# EAGLE board BLDC driver board 4 layer (EAGLE 6.1)
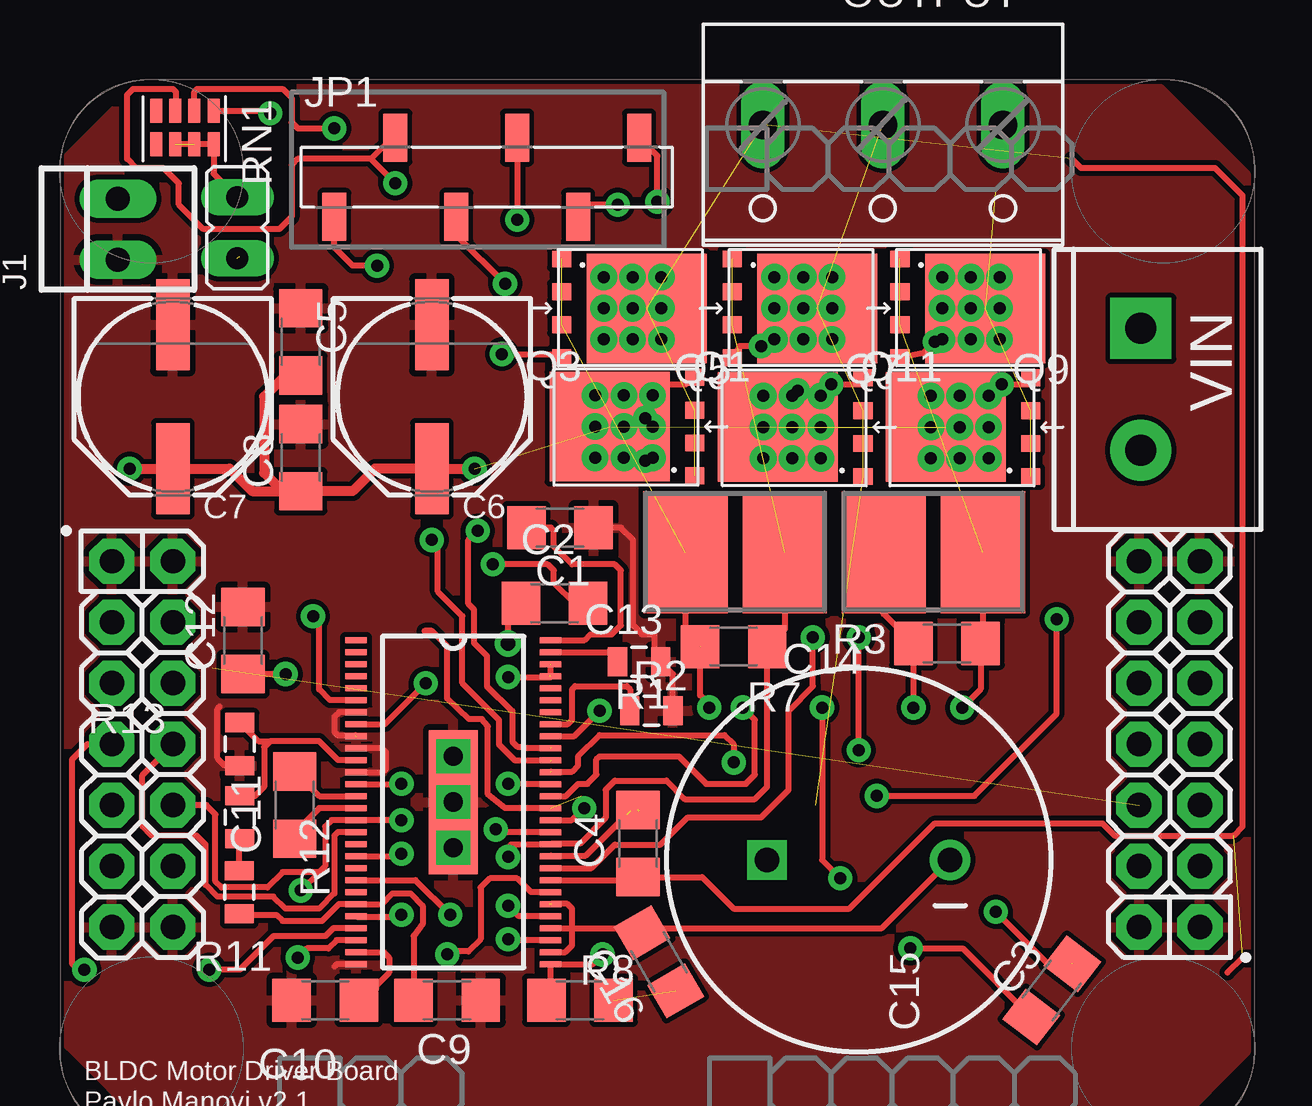
[diagram p0: board, top side]
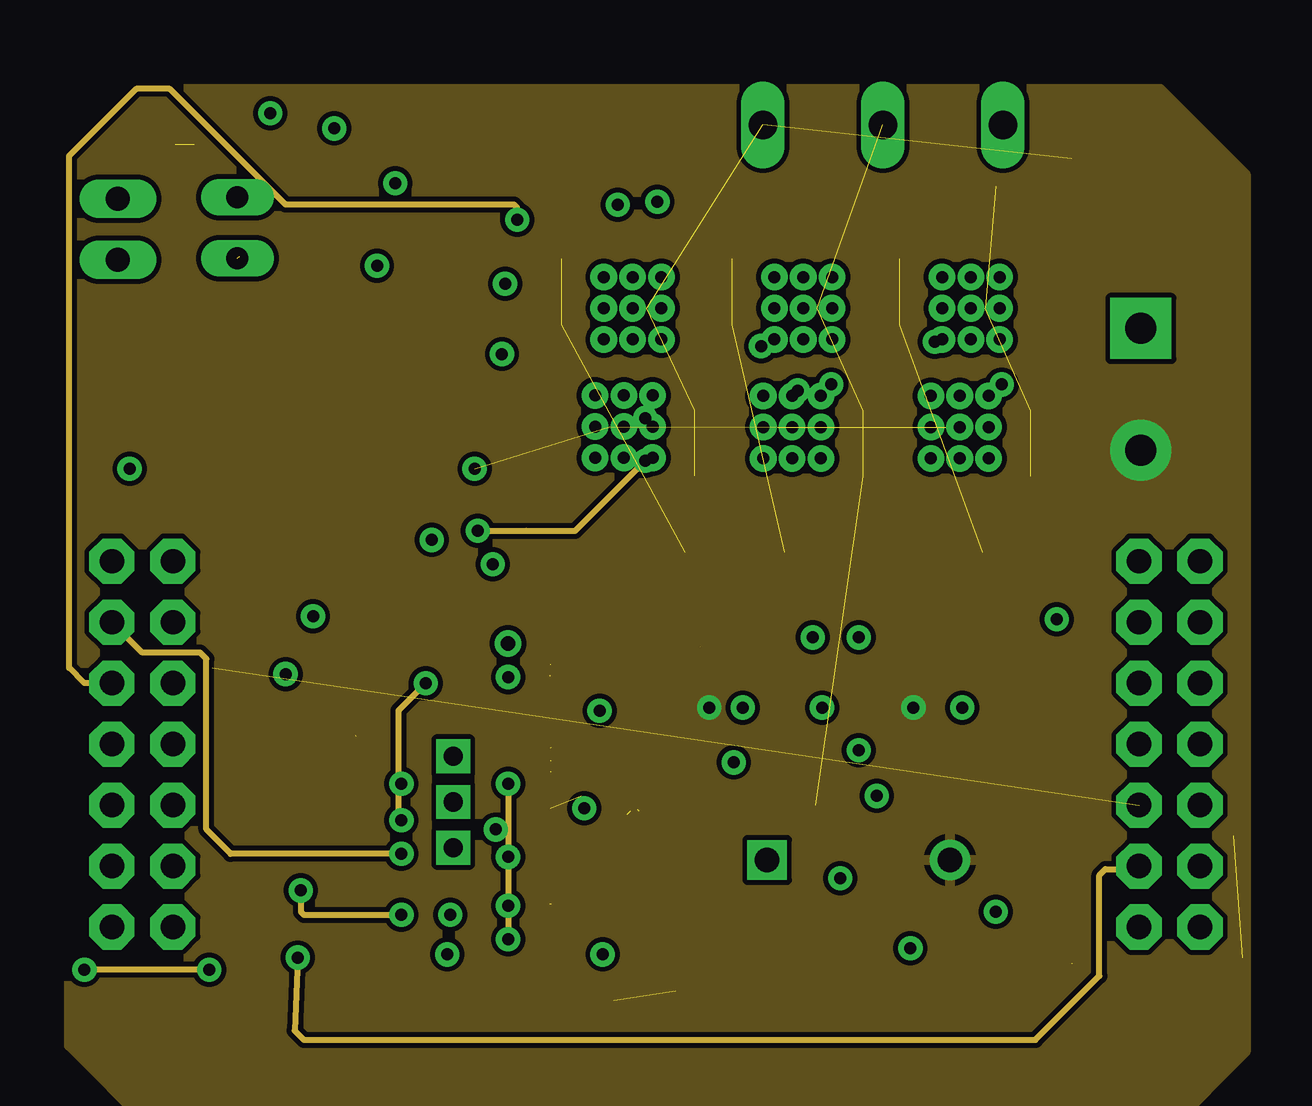
[diagram p1: board, inner layer Route2]
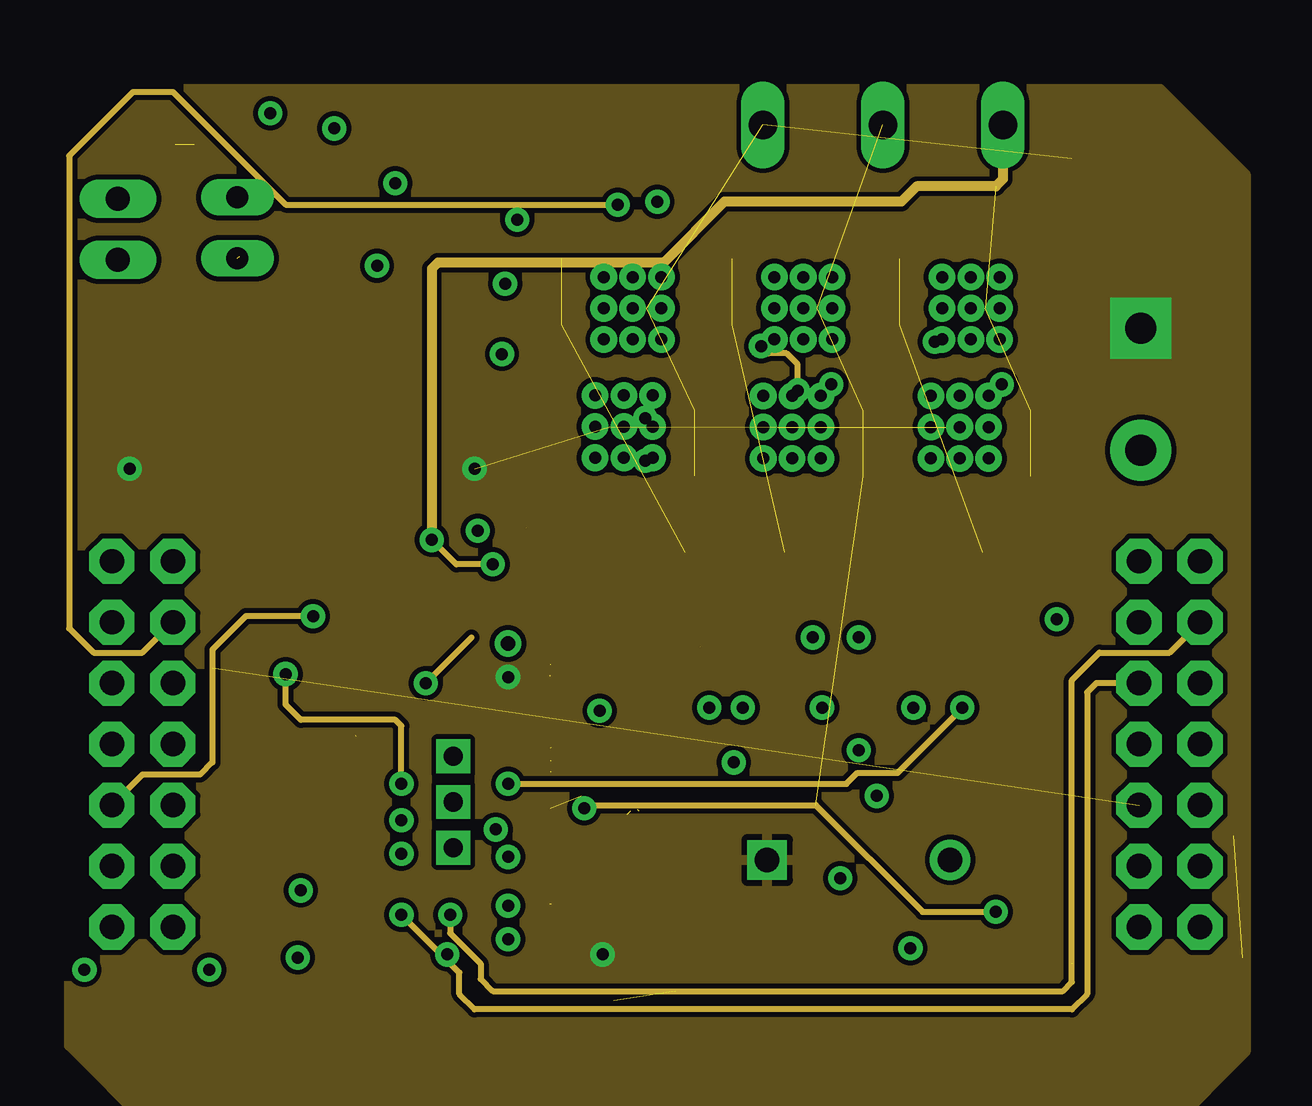
[diagram p2: board, inner layer Route15]
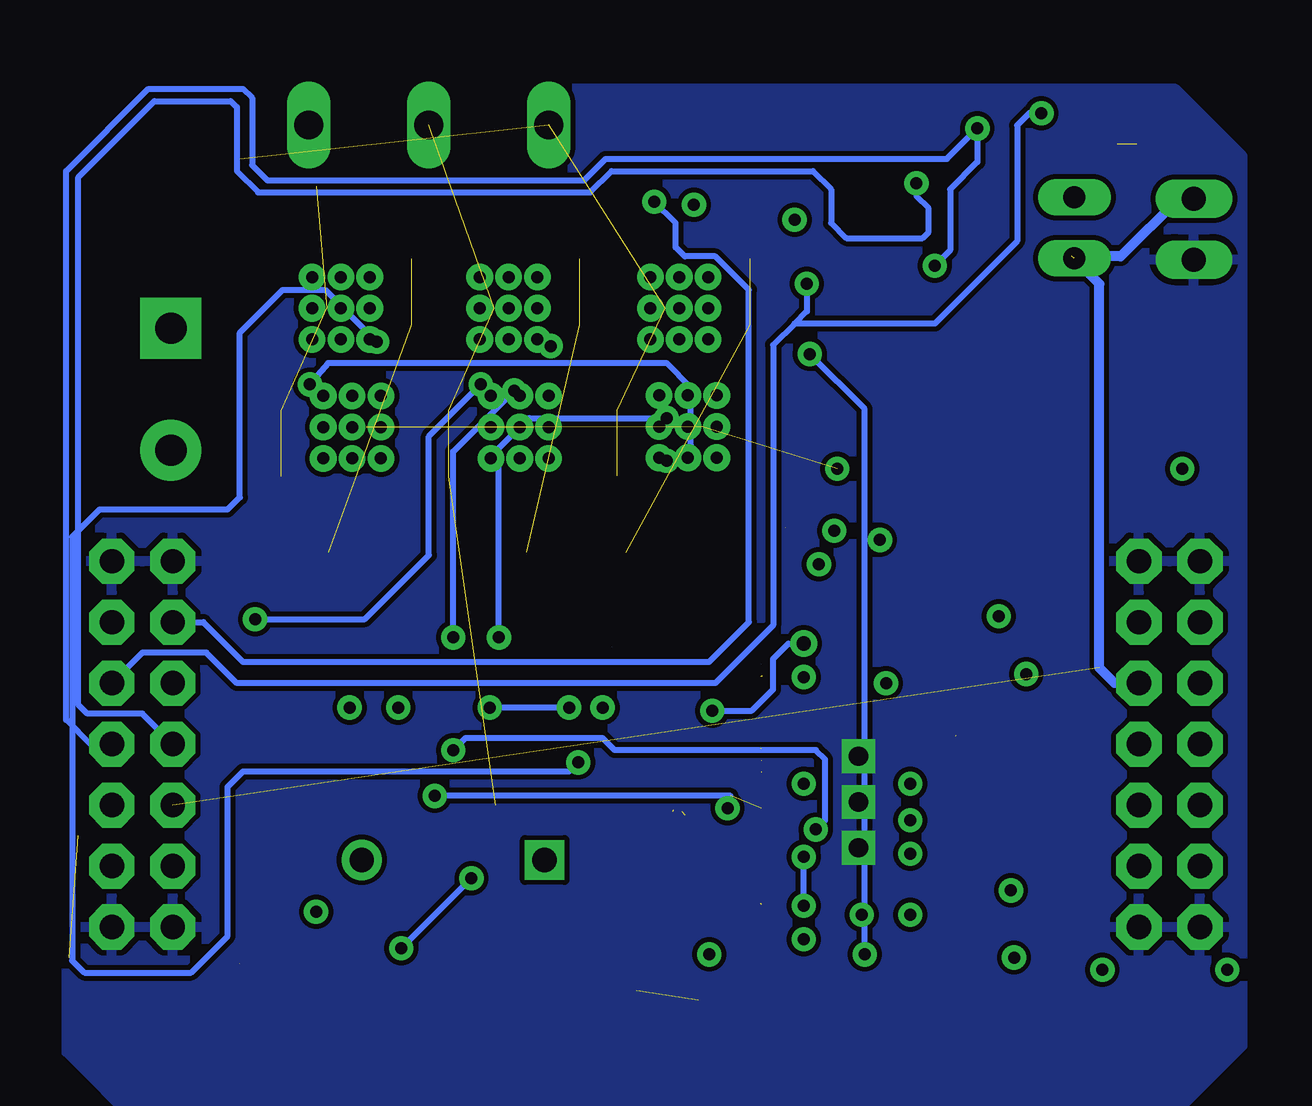
[diagram p3: board, bottom side, seen from below]

No outline drawn. Coordinates in mm, seen from the top.
Copper layers (1*2+15*16): Top 0.035mm / dielectric 1.5mm / Route2 0.035mm / dielectric 0.15mm / Route15 0.035mm / dielectric 0.2mm / Bottom 0.035mm
Design rules: minimum track width 8mil, minimum drill 20mil, track to track 8mil, track to pad 8mil, pad to pad 8mil, via to via 8mil, smd to smd 8mil, copper to edge 10mil, drill to drill 8mil, minimum pad ring 12mil, minimum via ring 10mil, stop-mask expansion 4mil, vias tented up to drill 25mil, thermal gap 10mil

## Footprints (pad centres in the part's own frame; a part is rotated, then mirrored left to right if it is on the bottom)
1206 = smd 1.6 x 1.8: 1 -1.4,0; 2 1.4,0
PANASONIC_E = smd 3.8 x 1.4: + 3,0; - -3,0
CPOL-RADIAL-1000UF-63V = drill 1.016 pad 1.651 square: 1 3.81,0 | drill 1.016 pad 1.676: 2 -3.81,0
HTSSOP56 = smd 0.9 x 0.25: 1 -4.05,6.75; 2 -4.05,6.25; 3 -4.05,5.75; 4 -4.05,5.25; 5 -4.05,4.75; 6 -4.05,4.25; 7 -4.05,3.75; 8 -4.05,3.25; 9 -4.05,2.75; 10 -4.05,2.25; 11 -4.05,1.75; 12 -4.05,1.25; 13 -4.05,0.75; 14 -4.05,0.25; 15 -4.05,-0.25; 16 -4.05,-0.75; 17 -4.05,-1.25; 18 -4.05,-1.75; 19 -4.05,-2.25; 20 -4.05,-2.75; 21 -4.05,-3.25; 22 -4.05,-3.75; 23 -4.05,-4.25; 24 -4.05,-4.75; 25 -4.05,-5.25; 26 -4.05,-5.75; 27 -4.05,-6.25; 28 -4.05,-6.75; 29 4.05,-6.75; 30 4.05,-6.25; 31 4.05,-5.75; 32 4.05,-5.25; 33 4.05,-4.75; 34 4.05,-4.25; 35 4.05,-3.75; 36 4.05,-3.25; 37 4.05,-2.75; 38 4.05,-2.25; 39 4.05,-1.75; 40 4.05,-1.25; 41 4.05,-0.75; 42 4.05,-0.25; 43 4.05,0.25; 44 4.05,0.75; 45 4.05,1.25; 46 4.05,1.75; 47 4.05,2.25; 48 4.05,2.75; 49 4.05,3.25; 50 4.05,3.75; 51 4.05,4.25; 52 4.05,4.75; 53 4.05,5.25; 54 4.05,5.75; 55 4.05,6.25; 56 4.05,6.75 | smd 2.032 x 6: 57 0,0 | drill 0.8 square: P$1 0,0; P$2 0,1.905; P$3 0,-1.905
SOCKET-MALE-2.54MM-2 = drill 1 long: 1 -1.27,0; 2 1.27,0
1X06_SMD_STRAIGHT = smd 1 x 2: 1 0,1.65; 2 -2.54,-1.65; 3 -5.08,1.65; 4 -7.62,-1.65; 5 -10.16,1.65; 6 -12.7,-1.65
JP1 = drill 0.914 long: 1 0,-1.27; 2 0,1.27
W237-103 = drill 1.194 long: 1 -5,-1.29; 2 0,-1.29; 3 5,-1.29
CSD173XXQX = smd 5 x 4.565: D 1.21,0 | smd 0.8 x 0.7: G 4.755,2.055; S1 4.755,0.685; S2 4.755,-0.685; S3 4.755,-2.055 | drill 0.5: P$1 3,1.3; P$2 3,0; P$3 3,-1.3; P$4 0.6,0; P$5 0.6,1.3; P$6 0.6,-1.3; P$7 1.8,1.3; P$8 1.8,0; P$9 1.8,-1.3
0805 = smd 0.8 x 1.2: 1 -0.9,0; 2 0.9,0
SMT-REF = smd 3.505 x 5.08: 1 2.134,0; 2 -2.007,0
EXB-38V271JV = smd 0.5 x 1: P$1 0,0; P$2 0.8,0; P$3 1.6,0; P$4 2.4,0; P$5 2.4,1.4; P$6 1.6,1.4; P$7 0.8,1.4; P$8 0,1.4
CAN_NODE_SHIELD_V3 = drill 1.016 pad 1.88 octagon: 3V3 44.704,19.05; 3V31 4.445,13.97; 5V 44.704,13.97; 5V1 4.445,19.05; A0 44.704,11.43; CAN_HIGH 1.905,11.43; CAN_LOW 4.445,11.43; GND 44.704,24.13; GND1 47.244,24.13; GND2 44.704,8.89; GND3 47.244,8.89; GND4 4.445,8.89; GND5 1.905,8.89; GND6 4.445,24.13; GND7 1.905,24.13; MCLR 47.244,13.97; PGC 1.905,13.97; PGD 47.244,11.43; RA2 1.905,16.51; RB0 47.244,16.51; RB1 44.704,16.51; RB2 47.244,19.05; RB8 4.445,16.51; RB9 4.445,21.59; RB10 1.905,19.05; RB12 1.905,21.59; RB14 47.244,21.59; RB15 44.704,21.59
SCREW_TERMINAL-5.08MM-2 = drill 1.3 pad 2.54 square: 1 -2.54,0 | drill 1.3 pad 2.54: 2 2.54,0

## Placement (x,y rotation side)
C1  .015uF  [1206]  23.11,25.53 180 top
C2  .1uF  [1206]  22.89,22.38 0 top
C3  .1uF  [1206]  43.61,6.25 52.5 top
C4  .1uF  [1206]  26.37,12.37 270 top
C5  .1uF  [1206]  12.32,33.27 90 top
C6  47uF  [PANASONIC_E]  17.78,30.99 270 top
C7  4.7uF  [PANASONIC_E]  6.99,30.99 270 top
C8  .1uF  [1206]  12.32,28.45 90 top
C9  1uF  [1206]  18.41,5.84 0 top
C10  1uF  [1206]  13.34,5.84 180 top
C11  22nF  [1206]  12.06,13.97 270 top
C12  2.2uF  [1206]  9.91,20.83 90 top
C13  1nF  [1206]  30.35,20.57 180 top
C14  1nF  [1206]  39.24,20.7 180 top
C15  470  [CPOL-RADIAL-1000UF-63V]  35.56,11.68 180 top
C16  10nF  [1206]  27.24,7.44 120 top
DRV8301  DRV8302  [HTSSOP56]  18.67,14.1 0 top
J1  [SOCKET-MALE-2.54MM-2]  4.7,37.97 90 top
JP1  [1X06_SMD_STRAIGHT]  26.42,40.13 0 top
JP3  [JP1]  9.68,38.02 180 top
OUTPUT  [W237-103]  36.58,41.02 180 top
Q1  CSD173XXQX-NEXFET  [CSD173XXQX]  30.99,29.72 0 top
Q3  CSD173XXQX-NEXFET  [CSD173XXQX]  23.98,29.74 0 top
Q5  CSD173XXQX-NEXFET  [CSD173XXQX]  27.94,34.67 180 top
Q7  CSD173XXQX-NEXFET  [CSD173XXQX]  35.05,34.67 180 top
Q9  CSD173XXQX-NEXFET  [CSD173XXQX]  42.04,34.67 180 top
Q11  CSD173XXQX-NEXFET  [CSD173XXQX]  37.97,29.72 0 top
R1  10k  [0805]  26.42,19.94 0 top
R2  1M  [0805]  26.92,17.91 0 top
R3  .01  [SMT-REF]  38.73,24.51 180 top
R7  .01  [SMT-REF]  30.48,24.51 180 top
R8  3.3  [1206]  23.95,5.84 180 top
R11  10k  [0805]  9.75,10.34 270 top
R12  3.16k  [0805]  9.78,13.46 270 top
R13  470  [0805]  9.78,16.51 90 top
RN1  [EXB-38V271JV]  8.69,42.9 180 top
U$2  CAN_NODE_SHIELD_V3  [CAN_NODE_SHIELD_V3]  2.54,0 0 top
VIN  [SCREW_TERMINAL-5.08MM-2]  47.32,31.29 270 top

## Library data of the parts
C1-C16 J1 JP1 R1 R2 R11-R13 U$2 = ASL
DRV8301 Q1 Q3 Q5 Q7 Q9 Q11 R3 R7 = pavlo
JP3 = jumper
OUTPUT = con-wago-500; MPN: 237-103; OC_FARNELL: unknown; OC_NEWARK: 18M7116
R8 VIN = CMPE118lib
RN1 = ASL; OC_FARNELL: unknown; OC_NEWARK: unknown

## Nets
3V3: DRV8301.8 DRV8301.16 DRV8301.24 U$2.3V3 U$2.3V31
ADC/HALL1: JP1.6 RN1.P$2 U$2.RB0
ADC/HALL2: JP1.5 RN1.P$3 U$2.RB1
ADC/HALL3: JP1.4 RN1.P$1 U$2.RB2
CRRNTSNS1: DRV8301.25 U$2.RA2
CRRNTSNS2: DRV8301.26 U$2.A0
GH_A: DRV8301.47 Q11.G
GH_B: DRV8301.42 Q1.G
GH_C: DRV8301.37 Q3.G
GL_A: DRV8301.45 Q9.G
GL_B: DRV8301.40 Q7.G
GL_C: DRV8301.35 Q5.G
GND: C1.1 C5.2 C6.- C7.- C8.2 C9.2 C10.2 C12.2 DRV8301.7 DRV8301.9 DRV8301.10 DRV8301.12 DRV8301.28 DRV8301.57 DRV8301.P$1 DRV8301.P$2 DRV8301.P$3 J1.1 R1.2 R2.2 R13.1 U$2.GND U$2.GND1 U$2.GND2 U$2.GND3 U$2.GND4 U$2.GND5 U$2.GND6 U$2.GND7
N$1: C1.2 DRV8301.56
N$2: DRV8301.6 U$2.PGC
N$3: DRV8301.49 R2.1
N$4: C2.1 DRV8301.48
N$6: C3.1 DRV8301.43
N$7: C16.1 R8.1
N$8: C4.1 DRV8301.38
N$9: R11.1 R12.2
N$10: DRV8301.55 R1.1
N$12: DRV8301.11 R12.1 R13.2
N$13: JP3.1 RN1.P$6 RN1.P$7 RN1.P$8
N$16: C10.1 DRV8301.27
N$18: C9.1 DRV8301.23 R11.2
N$19: C11.1 DRV8301.14
N$20: C11.2 DRV8301.15
N$21: C12.1 DRV8301.13
OUTPUTA: C2.2 DRV8301.46 OUTPUT.1 Q9.D Q11.S1 Q11.S2 Q11.S3
OUTPUTB: C3.2 DRV8301.41 OUTPUT.2 Q1.S1 Q1.S2 Q1.S3 Q7.D
OUTPUTC: C4.2 DRV8301.36 OUTPUT.3 Q3.S1 Q3.S2 Q3.S3 Q5.D
PWM1: DRV8301.17 U$2.RB8
PWM2: DRV8301.19 U$2.RB12
PWM3: DRV8301.21 U$2.RB14
QEI-A: JP1.3 U$2.RB10
QEI-B: JP1.2 U$2.RB9
QEI-INDEX: JP1.1 U$2.RB15
SN1: C13.1 DRV8301.33 DRV8301.39 Q7.S1 Q7.S2 Q7.S3 R7.2
SN2: C14.1 DRV8301.31 DRV8301.44 Q9.S1 Q9.S2 Q9.S3 R3.2
V_BATT: C5.1 C6.+ C7.+ C8.1 C15.1 DRV8301.29 DRV8301.53 DRV8301.54 Q1.D Q3.D Q11.D R8.2 VIN.1
VCC: J1.2 JP3.2 U$2.5V U$2.5V1
VNEG: C13.2 C14.2 C15.2 C16.2 DRV8301.30 DRV8301.32 DRV8301.34 Q5.S1 Q5.S2 Q5.S3 R3.1 R7.1 VIN.2

## Tracks (layer width: path | path; a pad name or v marks a point on that pad's centre or on a via)
3V3  (via drill 0.5)
  Top 0.254: 13.08,11.18 13.34,11.43 13.34,13.08 13.6,13.35 DRV8301.16 14.63,13.34 v16.51,13.34 | 13.08,11.18 11.56,11.18 10.92,10.54 9.02,10.54 8.76,10.79 8.76,13.59 8.38,13.97 U$2.3V31 | 13.08,11.18 v12.32,10.41 | DRV8301.24 14.64,9.32 16.43,9.32 v16.51,9.4 | DRV8301.8 15.82,17.35 v17.53,19.05
  Route2 0.254: v12.32,10.41 12.32,9.53 12.45,9.4 v16.51,9.4 | v17.53,19.05 16.38,17.91 16.38,13.46 v16.51,13.34
  Route15 0.254: v17.53,19.05 19.43,20.95 | U$2.3V3 45.47,19.05 45.09,18.67 45.09,6.1 44.45,5.46 19.56,5.46 18.92,6.1 18.92,6.99 v16.51,9.4
ADC/HALL1  (via drill 0.5)
  Top 0.254: RN1.P$2 7.89,43.7 8,43.81 11.56,43.81 11.94,43.43 11.94,42.42 12.19,42.16 v13.72,42.16 | v15.49,36.45 14.48,36.45 13.72,37.21 JP1.6
  Bottom 0.254: U$2.RB0 50.67,16.51 51.69,17.53 51.69,40.39 48.26,43.81 44.32,43.81 43.94,43.43 43.94,40.64 43.31,40.01 30.1,40.01 29.21,40.89 14.99,40.89 v13.72,42.16 13.72,40.77 14.86,39.62 14.86,37.08 v15.49,36.45
ADC/HALL2  (via drill 0.5)
  Top 0.254: JP1.5 16.13,41.78 15.24,40.89 | 15.24,40.89 12.19,40.89 11.94,40.64 11.94,38.48 11.43,37.97 8.26,37.97 7.24,38.99 7.24,39.88 6.6,40.51 5.46,40.51 5.08,40.89 5.08,43.56 5.33,43.81 6.99,43.81 7.11,43.69 7.11,42.93 RN1.P$3 | 15.24,40.89 v16.26,39.88
  Bottom 0.254: U$2.RB1 48.51,17.78 50.8,17.78 51.18,18.16 51.18,40.13 48.01,43.31 44.83,43.31 44.58,43.05 44.58,40.39 43.69,39.5 29.84,39.5 28.96,40.39 20.57,40.39 19.81,39.62 19.81,38.23 19.18,37.59 16,37.59 15.75,37.85 15.75,38.84 16.26,39.34 v16.26,39.88
ADC/HALL3  (via drill 0.5)
  Top 0.254: RN1.P$1 10.95,42.9 v11.05,42.8 | JP1.4 18.8,37.72 v20.83,35.69
  Bottom 0.254: 21.34,34.04 15.49,34.04 12.06,37.47 12.06,42.29 11.56,42.8 v11.05,42.8 | 21.34,34.04 22.23,33.15 22.23,21.46 24.64,19.05 44.58,19.05 45.85,20.32 48.51,20.32 U$2.RB2 | v20.83,35.69 20.83,34.54 21.34,34.04
CRRNTSNS1  (via drill 0.5)
  Top 0.254: DRV8301.25 13.67,8.85 13.34,8.51 11.18,8.51 9.78,7.11 v8.51,7.11 | v3.3,7.11 3.05,7.11 2.79,7.37 2.79,15.88 3.43,16.51 U$2.RA2
  Route2 0.254: v8.51,7.11 v3.3,7.11
CRRNTSNS2  (via drill 0.5)
  Top 0.254: DRV8301.26 13.81,8.35 13.46,8 12.57,8 v12.19,7.62
  Route2 0.254: v12.19,7.62 12.06,4.57 12.45,4.19 42.93,4.19 45.59,6.86 45.59,11.05 45.85,11.3 47.12,11.3 U$2.A0
GH_A  (via drill 0.5)  (1 unrouted)
  Top 0.254: v19.68,25.4 19.3,25.02 19.3,22.35 19.53,22.12 19.53,20.73 20.07,20.19 20.07,18.92 21.13,17.88 21.13,16.61 21.34,16.41 21.57,16.41 21.61,16.36 22.76,16.36 | v41.53,31.5 42.63,31.5 Q11.G
  Route2 0.254: v19.68,25.4 23.75,25.4 v26.67,28.32
  Bottom 0.254: v26.67,28.32 26.29,28.32 25.65,28.96 25.65,31.37 26.67,32.38 40.77,32.38 v41.53,31.5
GH_B  (via drill 0.5)  (1 unrouted)
  Top 0.254: v36.32,14.35 40.39,14.35 43.81,17.78 v43.81,21.72 | DRV8301.42 20.83,13.84 20.12,14.43 20.12,17.25 19.86,17.55 19.33,17.55 18.41,18.41 18.41,20.6 17.78,21.23 17.48,21.23 | v34.42,31.5 35.65,31.5 Q1.G
  Bottom 0.254: 24,14.35 v36.32,14.35 | v43.81,21.72 39.24,21.72 36.58,24.38 36.58,29.34 v34.42,31.5
GH_C  (via drill 0.5)
  Top 0.254: v33.66,20.95 33.66,18.92 32.64,17.91 32.64,14.61 31.5,13.46 28.45,13.46 27.3,12.32 25.4,12.32 24.43,11.35 DRV8301.37 | v26.67,30.1 26.67,31.11 27.05,31.5 28.35,31.5 Q3.G
  Bottom 0.254: v33.66,20.95 33.66,28.83 32.38,30.1 v26.67,30.1
GL_A  (via drill 0.5)  (1 unrouted)
  Top 0.254: 22.74,15.37 DRV8301.45 | 22.73,15.37 23.62,15.37 23.88,15.62 23.88,16 24.77,16.89 29.97,16.89 30.35,16.51 v30.35,15.75 | v38.73,33.27 38.24,32.79 Q9.G
  Bottom 0.254: v30.35,15.75 30.73,15.37 44.32,15.37 44.96,14.73 44.96,8.51 46.48,6.99 50.93,6.99 51.44,7.49 51.44,25.15 50.29,26.29 44.96,26.29 44.45,26.8 44.45,33.66 42.67,35.43 40.89,35.43 v38.73,33.27
GL_B  (via drill 0.5)
  Top 0.254: v35.56,16.26 v35.56,20.95 | DRV8301.40 20.55,12.85 v20.45,12.95 | v31.5,33.1 30.6,33.1 Q7.G
  Route15 0.254: v33.02,31.24 33.02,32.33 32.56,32.79 31.8,32.79 v31.5,33.1
  Bottom 0.254: v35.56,20.95 35.56,28.7 v33.02,31.24 | v20.45,12.95 20.07,13.34 20.07,15.88 20.45,16.26 28.83,16.26 29.34,16.76 35.05,16.76 v35.56,16.26
GL_C  (via drill 0.5)
  Top 0.254: v18.41,7.75 18.54,7.87 19.3,7.87 19.81,8.38 19.81,10.54 20.19,10.92 21.34,10.92 21.91,10.35 DRV8301.35 | v20.7,32.77 22.9,32.77 Q5.G
  Bottom 0.254: v18.41,7.75 18.41,30.48 v20.7,32.77
GND  (1 unrouted)
  Top 0.254: DRV8301.12 15.73,15.35 15.88,15.49 15.88,16.15 15.7,16.33 14.63,16.33 DRV8301.10 | R13.1 9.15,15.61 8.84,15.93 8.84,17.98 8.94,18.09 | DRV8301.7 13.91,17.85 13.72,17.65 13.72,17.02 13.84,16.89 14.61,16.89 | DRV8301.28 13.82,7.35 13.72,7.24 | 24.64,25.53 25.65,25.53 26.16,25.02 26.16,21.46 26.54,21.08 27.05,21.08 27.05,20.2 R1.2 27.82,19.43 R2.2
  pour Top: 5.46,43.81 48.13,43.81 51.69,40.26 51.69,3.68 48.51,0.51 6.1,0.51 2.67,3.94 2.67,41.02
  pour Bottom: 5.46,43.81 48.13,43.81 51.69,40.26 51.69,3.68 48.51,0.51 6.1,0.51 2.67,3.94 2.67,41.02
N$1  (1 unrouted)
  Top 0.254: 21.72,24.77 C1.2 | C1.2 22.73,25.53 22.86,25.4 22.86,24.77 23.62,24 25.4,24 25.65,23.75 25.65,21.46 25.27,21.08 24.38,21.08 24.15,20.85 DRV8301.56
N$2  (via drill 0.5)
  Top 0.254: DRV8301.6 13.53,18.35 13.08,18.8 13.08,21.59 v12.83,21.84
  Route15 0.254: v12.83,21.84 10.03,21.84 8.64,20.45 8.64,15.75 8.13,15.24 5.71,15.24 U$2.PGC
N$3
  Top 0.254: DRV8301.49 23.44,17.35 23.62,17.53 23.62,18.8 23.75,18.92 25.91,18.92 26.04,18.8 26.04,17.92 R2.1
N$4  (via drill 0.5, 0.6)
  Top 0.254: DRV8301.48 23.7,16.85 v24.77,17.91 | v20.95,20.7 20.95,21.85 C2.1
  Bottom 0.254: v24.77,17.91 23.11,17.91 22.23,18.8 22.23,20.07 21.59,20.7 v20.95,20.7
N$6  (via drill 0.5)
  Top 0.254: DRV8301.43 23.36,14.35 23.88,14.86 24.26,14.86 24.64,15.24 24.64,15.88 24.77,16 28.07,16 29.21,14.86 30.86,14.86 31.24,15.24 31.24,17.53 v30.73,18.03 | v34.04,18.03 34.04,11.68 v34.8,10.92 | v37.72,8 39.89,8 C3.1
  Bottom 0.254: v30.73,18.03 v34.04,18.03 | v34.8,10.92 v37.72,8
N$7  (1 unrouted)
  Top 0.254: 25.4,5.54 R8.1
N$8  (2 unrouted)
  Top 0.254: DRV8301.38 22.73,11.86 24.18,11.86 26.04,13.72 | 25.91,13.56 26.26,13.56 26.42,13.72
N$9
  Top 0.254: R11.1 9.75,12.54 R12.2
N$10
  Top 0.254: DRV8301.55 25.11,20.35 R1.1
N$12
  Top 0.254: DRV8301.11 13.87,15.85 13.08,16.64 11.05,16.64 | 11.05,16.64 10.79,16.38 10.79,14.73 10.41,14.35 9.77,14.35 | 9.78,14.48 9.65,14.35 9.77,14.35 | 9.78,14.48 9.78,14.61 | 9.78,14.48 R12.1 | R12.1 9.78,14.22 | R13.2 10.55,16.64 11.05,16.64 | R12.1 9.77,14.35
N$13  (1 unrouted)
  Top 0.254: RN1.P$6 RN1.P$8 8.69,40.28 JP3.1
N$16
  Top 0.254: DRV8301.27 15.78,7.85 16,7.62 16,6.99 15.44,6.43 15.44,6.3 C10.1
N$18
  Top 0.254: R11.2 9.79,9.4 11.3,9.4 11.56,9.14 13.21,9.14 13.92,9.86 DRV8301.23 15.69,9.85 16.13,10.29 16.89,10.29 17.4,9.78 17.4,9.02 17.02,8.51 17.02,5.59 C9.1
N$19
  Top 0.254: C11.1 13.09,14.35 DRV8301.14
N$20
  Top 0.254: DRV8301.15 13.08,13.84 12.06,12.83 C11.2
N$21  (via drill 0.5)
  Top 0.254: DRV8301.13 16.12,14.85 v16.51,14.86 | v11.68,19.43 C12.1
  Route15 0.254: v16.51,14.86 16.51,17.27 16.26,17.53 12.32,17.53 11.68,18.16 v11.68,19.43
OUTPUTA  (via drill 0.5)  (5 unrouted)
  Top 0.254: 22.73,15.82 21.26,15.82 20.57,16.51 20.57,17.53 19.05,19.05 19.05,21.84 18.03,22.86 18.03,24.77 v17.78,25.02 | C2.2 23.75,22.35 22.86,23.24 22.86,23.75 22.61,24 v20.32,24
  Route15 0.254: v20.32,24 18.8,24 v17.78,25.02
  Route15 0.406: OUTPUT.1 41.58,40.05 41.27,39.75 37.97,39.75 37.34,39.12 29.97,39.12 27.43,36.58 18.03,36.58 17.78,36.32 v17.78,25.02
OUTPUTB  (via drill 0.5)  (6 unrouted)
  Top 0.254: DRV8301.41 23.61,13.35 v24.13,13.84 | v41.27,9.53 43.43,7.37 C3.2
  Route15 0.254: v24.13,13.84 24.26,13.97 33.78,13.97 38.23,9.53 v41.27,9.53
OUTPUTC  (6 unrouted)
  Top 0.254: DRV8301.36 26.24,10.85 C4.2 29.04,10.97 30.35,9.65 35.18,9.65 38.73,13.21 45.72,13.21 46.23,12.7 51.18,12.7 51.56,13.08 51.56,39.37 50.42,40.51 44.83,40.51 44.45,40.89 | 50.93,6.99 51.56,7.62
PWM1
  Top 0.254: DRV8301.17 13.86,12.85 13.72,12.7 13.72,10.29 13.08,9.65 11.68,9.65 11.18,10.16 8.84,10.16 8.36,10.64 8.36,12.32 7.98,12.7 6.1,12.7 5.71,13.08 5.71,15.21 6.99,16.48 U$2.RB8
PWM2  (via drill 0.5)
  Top 0.254: DRV8301.19 16.16,11.85 v16.51,11.94
  Route2 0.254: v16.51,11.94 9.4,11.94 8.38,12.95 8.38,20.07 8.13,20.32 5.71,20.32 U$2.RB12
PWM3  (via drill 0.5)
  Top 0.254: DRV8301.21 17.09,10.85 v18.54,9.4
  Route15 0.254: v18.54,9.4 18.54,8.64 19.81,7.37 19.81,6.73 20.32,6.22 44.07,6.22 44.45,6.6 44.45,19.18 45.59,20.32 48.51,20.32 U$2.RB14
QEI-A  (via drill 0.5)
  Top 0.254: JP1.3 v21.34,38.35
  Route2 0.254: v21.34,38.35 21.34,38.86 21.21,38.99 11.68,38.99 6.86,43.81 5.46,43.81 2.67,41.02 2.67,19.68 3.3,19.05 U$2.RB10
QEI-B  (via drill 0.5)
  Top 0.254: v25.53,38.99 24.38,38.99 JP1.2
  Route15 0.254: U$2.RB9 5.71,20.32 3.68,20.32 2.67,21.34 2.67,41.02 5.33,43.69 6.99,43.69 11.68,38.99 v25.53,38.99
QEI-INDEX  (via drill 0.5)
  Top 0.254: v27.18,39.12 27.18,41.02 JP1.1
  Bottom 0.254: U$2.RB15 45.97,21.59 44.32,19.94 24.89,19.94 23.24,21.59 23.24,35.43 24.64,36.83 25.91,36.83 26.29,37.21 26.29,38.23 v27.18,39.12
SN1  (via drill 0.5)  (3 unrouted)
  Top 0.254: R7.2 32.49,21.31 C13.1 31.75,14.73 31.24,14.22 28.32,14.22 27.56,14.99 25.4,14.99 25.02,14.61 25.02,13.44 23.95,12.37 22.78,12.37 22.73,12.32 | DRV8301.33 21.39,9.35 v20.95,9.78 | DRV8301.39 22.72,12.33 22.73,12.32 | 22.73,12.32 21.08,12.32 20.95,12.19 v20.95,11.81
  Bottom 0.254: v20.95,9.78 v20.95,11.81
SN2  (via drill 0.5)  (3 unrouted)
  Top 0.254: R3.2 40.74,20.8 C14.1 40.64,18.8 v39.88,18.03 | DRV8301.31 20.99,8.35 v20.95,8.38 | DRV8301.44 21.7,14.85 v20.95,14.86
  Route2 0.254: v20.95,14.86 v20.95,8.38
  Route15 0.254: v39.88,18.03 39.88,18.01 37.19,15.32 35.51,15.32 35.05,14.86 v20.95,14.86
V_BATT  (via drill 0.5)  (6 unrouted)
  Top 0.254: 11.56,27.05 12.19,27.05 12.32,26.92 C8.1 | C8.1 12.45,26.92 12.44,26.92 C8.1 | C8.1 | C5.1 11.68,31.87 | 22.71,19.36 22.73,19.33 22.73,19.84 | R8.2 22.72,5.75 DRV8301.29 24.49,7.35 v24.89,7.75 | 22.68,19.36 22.73,19.3 v20.95,19.3
  Top 0.406: C7.+ 9.35,27.99 10.29,27.05 11.56,27.05 10.79,27.81 10.79,30.99 11.68,31.87 | C8.1 14.48,27.05 15.41,27.99 C6.+ v19.55,27.99 v19.56,27.99 | v5.18,27.99 6.93,27.99 6.99,27.94 | 7.11,28.07 6.99,27.94 | 6.99,27.94 6.99,28.07
  pour Route15: 5.46,43.81 48.13,43.81 51.69,40.26 51.69,3.68 48.51,0.51 6.1,0.51 2.67,3.94 2.67,41.02
VCC  (2 unrouted)
  Bottom 0.406: U$2.5V1 8,19.05 8.64,19.68 8.64,35.69 9.78,36.83 7.75,36.83 5.33,39.24 J1.2
VNEG  (via drill 0.5)  (6 unrouted)
  Top 0.254: 23.62,8.85 DRV8301.32 23.58,8.85 23.62,8.89 23.62,9.65 23.42,9.86 22.76,9.86 | 23.62,8.85 26.35,8.85 | 26.35,8.85 C16.2 | DRV8301.30 23.34,7.85 23.62,8.13 23.62,8.85 | R7.1 28.35,21.18 C13.2 | R3.1 36.6,21.94 C14.2 v37.84,18.04 v37.85,18.03 | 22.71,9.86 22.73,9.83 22.73,9.86 22.71,9.83 | 26.35,8.85 36.53,8.85 C15.2 | v29.34,18.03 29.34,18.16 28.96,18.54 C13.2
  pour Route2: 5.46,43.81 48.13,43.81 51.69,40.26 51.69,3.68 48.51,0.51 6.1,0.51 2.67,3.94 2.67,41.02

## Text on the board
tNames: + | - | PWRGD | BLDC Motor Driver Board | Pavlo Manovi v2.1